# Altium PCB Arduino Shield v1.3.pcbdoc
Units mil, origin at the board's own origin, x right, y up, seen from the top; angles counter-clockwise.
Board outline 4000 x 2100 mil, 2 copper layers (Top Layer, Bottom Layer); 54 components, 94 nets, 211 pads, 0 vias.
Unrouted connection lines stored in the file: 2.
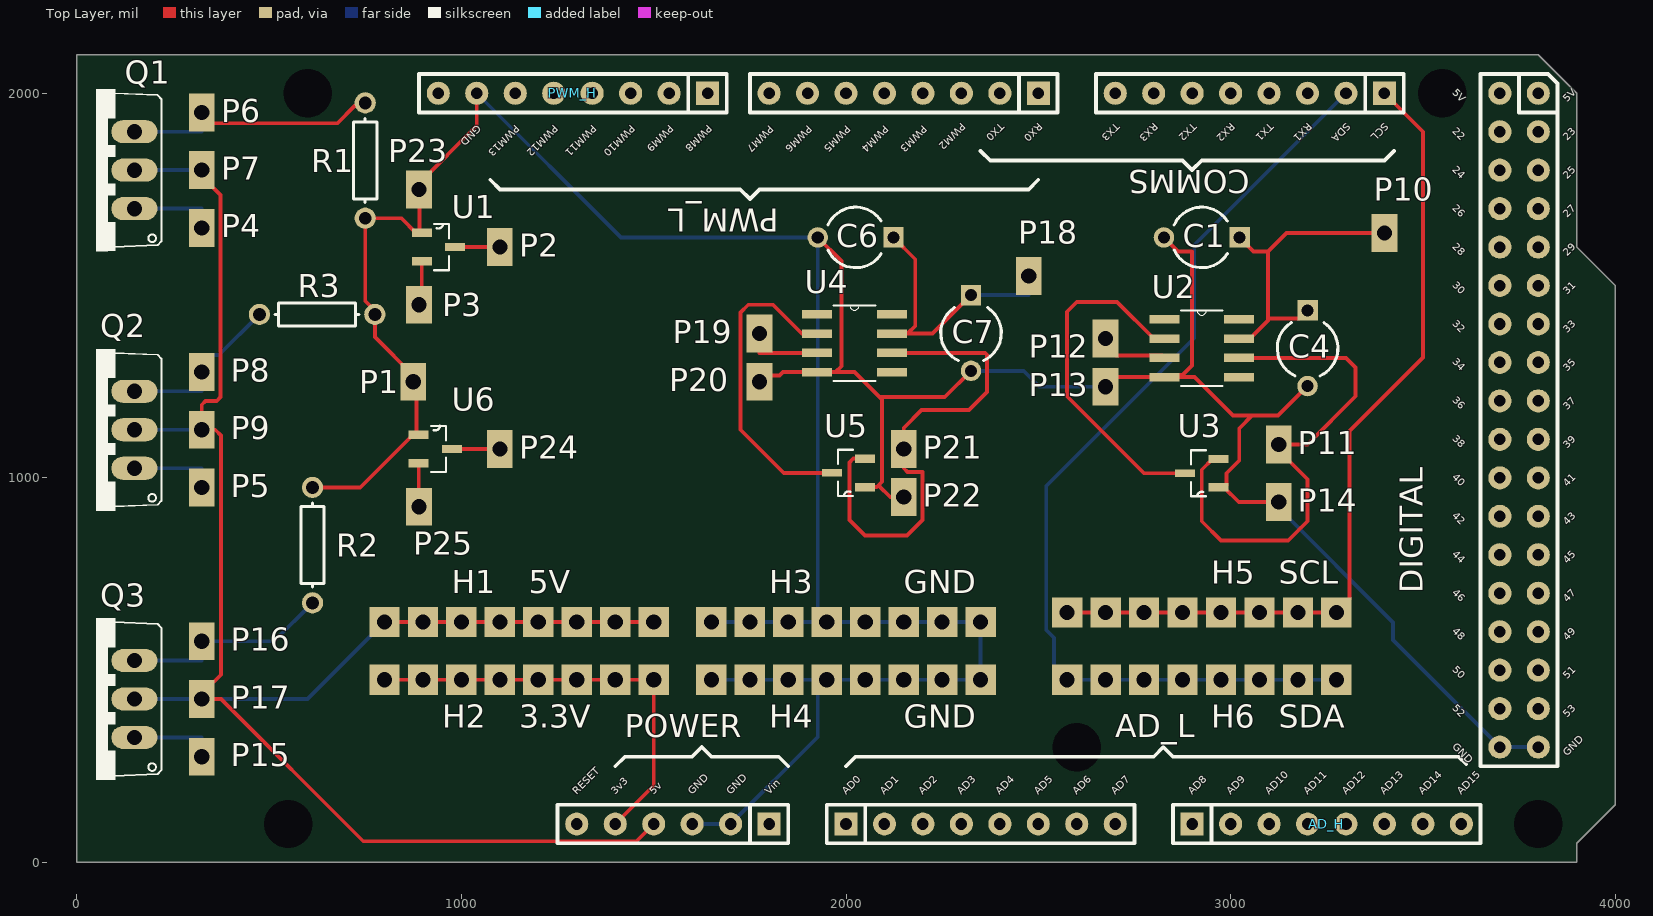
[diagram p0: Top Layer view]
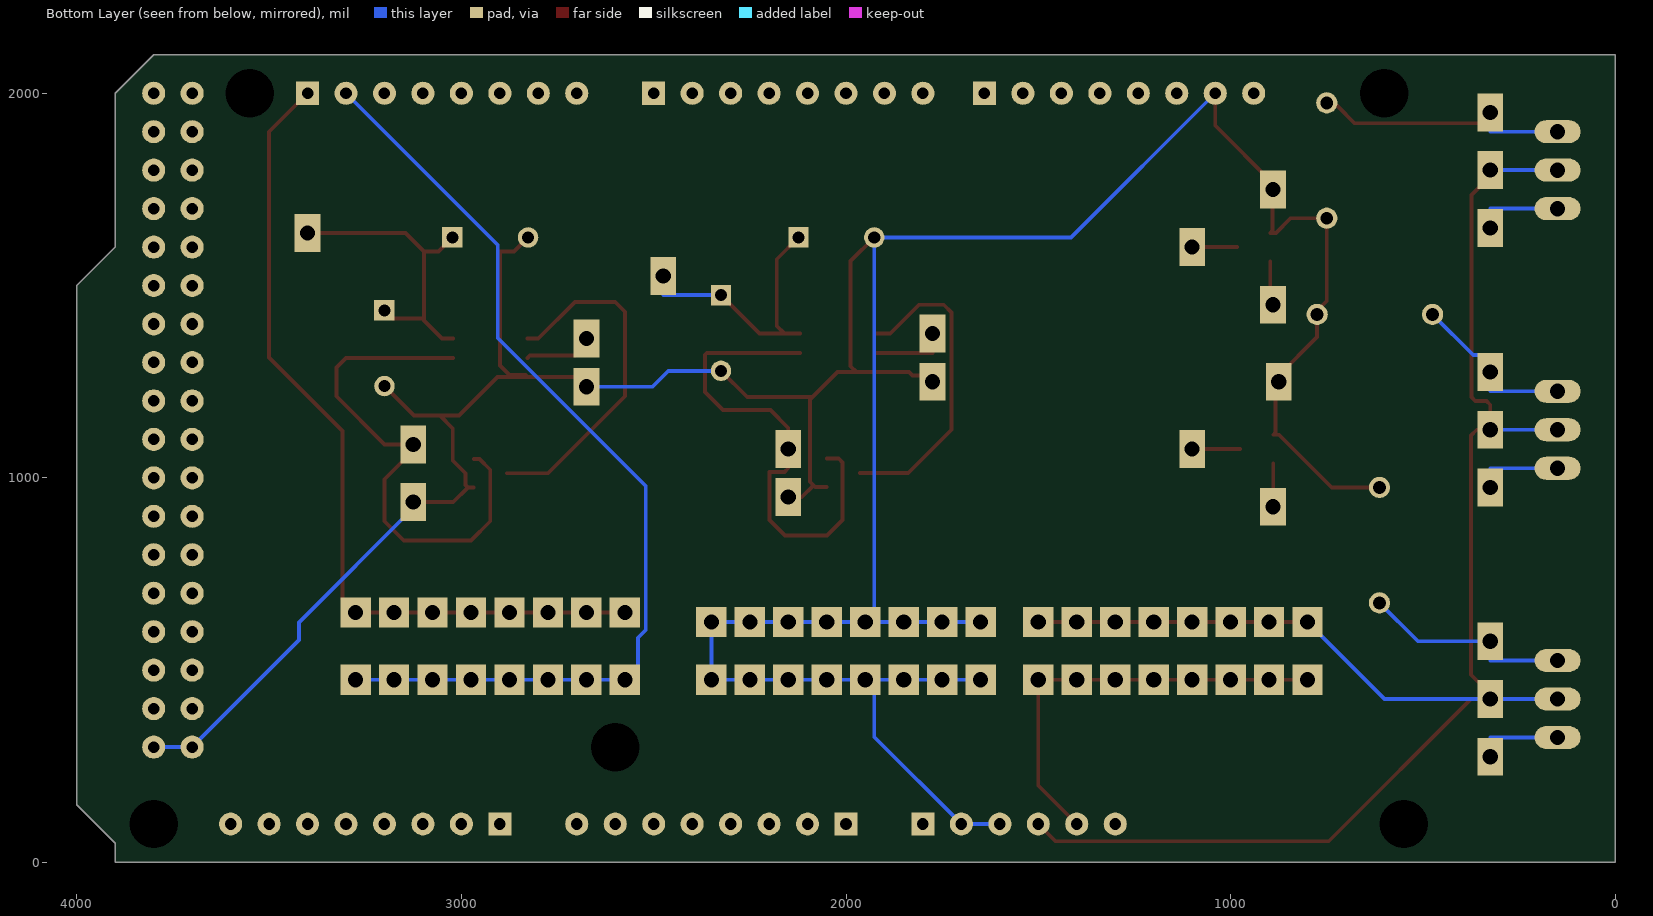
[diagram p1: Bottom Layer view, seen from below]

## Layer stack, top to bottom
Top Solder: solder mask 0.4, Solder Resist, Dk 3.5
Top Layer: signal copper 1.4
Dielectric1: dielectric 12.6, FR-4, Dk 4.8
Bottom Layer: signal copper 1.4
Bottom Solder: solder mask 0.4, Solder Resist, Dk 3.5

## Board outline
0,0 0,2100 3800,2100 3900,2000 3900,1600 4000,1500 4000,150 3900,50 3900,0

## Design rules (kind name [scope] priority, off if disabled: settings)
Clearance [All] p1: gap=10 ignorepadtopadclearanceinfootprint=FALSE except(0: Arc-Hole Track-Hole SMDPad-Hole THPad-Hole Via-Hole Fill-Hole Poly-Hole Region-Hole Text-Hole)
PolygonConnect [All] p1: connectstyle=Relief reliefconductorwidth=10 reliefentries=4 polygonreliefangle="90 Angle" airgapwidth=10
RoutingVias [All] p1: holewidth=28 width=50 viastyle="Through Hole" minholewidth=28 minwidth=50 maxholewidth=28 maxwidth=50
SilkToSolderMaskClearance SilkscreenOverComponentPads [IsPad] p1: minsilkscreentomaskgap=10 clearancetoexposedcopper=TRUE
SolderMaskExpansion [All] p1: expansion=4
Width [All] p1: maxlimit=10 minlimit=10 preferedwidth=10
29 further rules are at their usual default settings.

## Classes and differential pairs
component class "AdruinoMegaSheild v1.1": AD_H AD_L Analog C1 C4 C6 C7 COMMS DIGITAL P2 P4 P5 P6 P7 P8 P9 P10 P11 P12 P13 P14 P15 P16 P18 P19 P20 P21 P22 P24 POWER PWM_H PWM_L Q1 Q2 Q3 U1 U2 U3 U4 U5 U6

## Components (designator, comment, footprint, x,y, rotation, side; value= is the part's Value field where it differs from the comment)
AD_H "AD_H" "Header 8x1 8.5mm" 2900,100 r0 top locked
AD_L "AD_L" "Header 8x1 8.5mm" 2000,100 r0 top locked
C1 "Cap2" CAPR5-4X5 2925,1625 r180 top value=100uF
C4 "Cap2" CAPR5-4X5 3200,1337 r270 top value=100pF
C6 "Cap2" CAPR5-4X5 2025,1625 r180 top value=100uF
C7 "Cap2" CAPR5-4X5 2325,1376.57 r270 top value=100pF
COMMS "Communication" "Header 8x1 8.5mm" 3400,2000 r180 top
DIGITAL "IO_36" "HEADER 36X 8MM" 3800,2000 r270 top locked
H1 "Header 1x8" "Header 1x8 male" 1300,625 r180 top
H2 "Header 1x8" "Header 1x8 male" 1300,475 r180 top
H3 "Header 1x8" "Header 1x8 male" 2150,625 r180 top
H4 "Header 1x8" "Header 1x8 male" 2150,475 r180 top
H5 "Header 1x8" "Header 1x8 male" 3075,650 r180 top
H6 "Header 1x8" "Header 1x8 male" 3075,475 r180 top
P1 "Sig in RN Schmalz" "Header 1x1 long" 875,1250 r0 top
P2 "Sig out RN Schmalz" "Header 1x1 long" 1100,1600 r0 top
P3 "GND RN Schmalz" "Header 1x1 long" 890,1450 r0 top
P4 "X-axis lim switch sig" "Header 1x1 long" 325,1650 r0 top
P5 "Y-axis lim switch sig" "Header 1x1 long" 325,975 r0 top
P6 "FET Source x-axis lim" "Header 1x1 long" 325,1950 r0 top
P7 "FET Drain x-axis lim" "Header 1x1 long" 325,1800 r0 top
P8 "FET Source y-axis lim" "Header 1x1 long" 325,1275 r0 top
P9 "FET Drain y-axis lim" "Header 1x1 long" 325,1125 r0 top
P10 "12VDC" "Header 1x1 long" 3400,1637 r0 top
P11 "AMP HV OUTPUT" "Header 1x1 long" 3125,1087 r0 top
P12 "DAC0 DUE" "Header 1x1 long" 2675,1362 r0 top
P13 "GND AMP HV" "Header 1x1 long" 2675,1237 r0 top
P14 "GND AMP HV" "Header 1x1 long" 3125,937 r0 top
P15 "Z-axis lim switch sig" "Header 1x1 long" 325,275 r0 top
P16 "FET Source z-axis lim" "Header 1x1 long" 325,575 r0 top
P17 "FET Drain z-axis lim" "Header 1x1 long" 325,425 r0 top
P18 "12VDC" "Header 1x1 long" 2475,1525 r0 top
P19 "DAC1 DUE" "Header 1x1 long" 1775,1375 r0 top
P20 "GND AMP SMC" "Header 1x1 long" 1775,1250 r0 top
P21 "AMP SMC OUTPUT" "Header 1x1 long" 2150,1075 r0 top
P22 "GND AMP SMC" "Header 1x1 long" 2150,950 r0 top
P23 "Sig in RN SMC OUT" "Header 1x1 long" 890,1750 r0 top
P24 "Sig out RN SMC OUT" "Header 1x1 long" 1100,1075 r0 top
P25 "GND RN SMC OUT" "Header 1x1 long" 890,925 r0 top
POWER "POWER" "Header 6x1 8.5mm" 1800,100 r180 top locked
PWM_H "PWM_H" "Header 8x1 8.5mm" 1640,2000 r180 top locked
PWM_L "PWM_L" "Header 8x1 8.5mm" 2500,2000 r180 top locked
Q1 "FQP30N06L" *TO220V 50,1800 r90 top
Q2 "FQP30N06L" *TO220V 50,1125 r90 top
Q3 "FQP30N06L" *TO220V 50,425 r90 top
R1 "10k ohm" AXIAL-0.3 750,1825 r90 top value=10k
R2 "10k ohm" AXIAL-0.3 612.99,825 r270 top value=10k
R3 "10k ohm" AXIAL-0.3 625,1425 r180 top value=10k
U1 "5k,10k res network Schmalz" *SOT95P237X112-3N 940,1600 r0 top
U2 "TLV2371IDR" *SOIC127P600X175-8N 2925,1337 r0 top
U3 "REF2940AIDBZR" *SOT95P237X112-3N 2925,1012 r180 top
U4 "TLV2371IDR" *SOIC127P600X175-8N 2022,1350 r0 top
U5 "REF2940AIDBZR" *SOT95P237X112-3N 2007,1013 r180 top
U6 "5k,10k res network SMC OUT" *SOT95P237X112-3N 932,1075 r0 top

## Footprints (in the part's own frame and the unit in brackets; to place one, negate y for a bottom-side part, rotate by r counter-clockwise, add the part's x,y. Pads: shape width x height; smd on the part's side, far side on the other; paste and mask are expansions set on the pad)
*SOIC127P600X175-8N [mil]
  rect 78x22 smd: 1(-97,75) 2(-97,25) 3(-97,-25) 4(-97,-75) 5(97,-75) 6(97,-25) 7(97,25) 8(97,75)
  silkscreen extent -54,-98 54,98
*SOT95P237X112-3N [mil]
  rect 52x22 smd: 1(-43,37) 2(-43,-37)
  rect 52x20 smd: 3(43,0)
  silkscreen extent -11,-60 28,60
*TO220V [mil]
  oval 60x120 hole 40: 1(-100,-100) 2(0,-100) 3(100,-100)
  silkscreen extent -210,-170 210,0
AXIAL-0.3 [mm] "Axial Device, Thru-Hole; 2 Leads; 0.3 in Pin Spacing"
  round 1.4 hole 0.85: 1(-3.81,0) 2(3.81,0)
  silkscreen extent -2.77,-0.76 2.77,0.76
CAPR5-4X5 [mm] "Capacitor; 2 Leads"
  rect 1.35x1.35 hole 0.8: 1(-2.5,0)
  round 1.35 hole 0.8: 2(2.5,0)
  silkscreen extent -1.69,-2 1.82,2
"Header 1x1 long" [mm] "2.54mm"
  rect 1.7x2.5 hole 1: 1(0,0)
"Header 1x8 male" [mm] "2.54mm"
  rect 2x2 hole 1: 1(-5.08,0) 2(-2.54,0) 3(0,0) 4(2.54,0) 5(5.08,0) 6(7.62,0) 7(10.16,0) 8(12.7,0)
  body extent -6.35,-1.27 13.97,1.27, height 8.6
"Header 6x1 8.5mm" [mil] "Stackable 6 pin header"
  rect 60x60 hole 30: 1(0,0)
  round 60 hole 30: 2(100,0) 3(200,0) 4(300,0) 5(400,0) 6(500,0)
  silkscreen extent -50,-50 550,50, body extent -50,-50 550,50, height 335
"Header 8x1 8.5mm" [mil] "Stackable 8 pin header"
  rect 60x60 hole 30: 1(0,0)
  round 60 hole 30: 2(100,0) 3(200,0) 4(300,0) 5(400,0) 6(500,0) 7(600,0) 8(700,0)
  silkscreen extent -50,-50 750,50, body extent -50,-50 750,50, height 335
"HEADER 36X 8MM" [mil] "Stackable 10 pin header"
  round 60 hole 30: 1(0,0) 2(0,-100) 3(100,0) 4(100,-100) 5(200,0) 6(200,-100) 7(300,0) 8(300,-100) 9(400,0) 10(400,-100) 11(500,0) 12(500,-100) 13(600,0) 14(600,-100) 15(700,0) 16(700,-100) 17(800,0) 18(800,-100) 19(900,-100) 20(900,0) 21(1000,0) 22(1000,-100) 23(1100,0) 24(1100,-100) 25(1200,0) 26(1200,-100) 27(1300,0) 28(1300,-100) 29(1400,0) 30(1400,-100) 31(1500,0) 32(1500,-100) 33(1600,0) 34(1600,-100) 35(1700,0) 36(1700,-100)
  silkscreen extent -50,-150 1750,50, body extent -50,-150 1750,50, height 335

## Part data
C1 C4 C6 C7: "Capacitor", PackageDescription="Capacitor; 2 Leads", PackageReference=CAPR5-4X5, Published=23-Sep-2002, Publisher="Altium Limited"
P1 P2 P3 P4 P5 P6 P7 P8 P9 P10 P11 P12 P13 P14 P15 P16 P17 P18 P19 P20 P21 P22 P23 P24 P25: library part "Header 1x1"
Q1: "X-axis limit FET: / MOSFET Transistor, N Channel, 32 A, 60 V, 27 mohm, 10 V, 2.5 V,", Package="TO-220 ON Semiconductor", Availability=Unavailable, MF="ON Semiconductor", MP=FQP30N06L, Price=None, SnapEDA_Link=https://www.snapeda.com/parts/FQP30N06L/ON%20Semiconductor/view-part/?ref=snap
Q2 Q3: "Y-axis limit FET: / MOSFET Transistor, N Channel, 32 A, 60 V, 27 mohm, 10 V, 2.5 V", Package="TO-220 ON Semiconductor", Availability=Unavailable, MF="ON Semiconductor", MP=FQP30N06L, Price=None, SnapEDA_Link=https://www.snapeda.com/parts/FQP30N06L/ON%20Semiconductor/view-part/?ref=snap
R1 R2 R3: library part Res1, "Resistor", LatestRevisionDate=17-Jul-2002, LatestRevisionNote="Re-released for DXP Platform.", PackageDescription="Axial Device, Thru-Hole; 2 Leads; 0.3 in Pin Spacing", PackageReference=AXIAL-0.3, Published=8-Jun-2000, Publisher="Altium Limited"
U1 U6: library part REF2940AIDBZR, "4.096V 100ppm/Degrees C, 50uA in SOT23-3 Series _Bandgap_ Voltage Reference 3-SOT-23 -40 to 125", Package="SOT-23-3 Texas Instruments", Availability=Unavailable, MF="Texas Instruments", MP=REF2940AIDBZR, Price=None, SnapEDA_Link=https://www.snapeda.com/parts/REF2940AIDBZR/Texas%20Instruments/view-part/?ref=snap
U3 U5: "4.096V 100ppm/Degrees C, 50uA in SOT23-3 Series _Bandgap_ Voltage Reference 3-SOT-23 -40 to 125", Package="SOT-23-3 Texas Instruments", Availability=Unavailable, MF="Texas Instruments", MP=REF2940AIDBZR, Price=None, SnapEDA_Link=https://www.snapeda.com/parts/REF2940AIDBZR/Texas%20Instruments/view-part/?ref=snap

## Free pads (board coordinates)
  round 62.99 hole 125.98: 0(550,100) 0(600,2000) 0(2600,300) 0(3550,2000) 0(3800,100)

## Nets (pads, with @x,y where several pads share a name; then routed paths per layer and width w, separated by ;. In a path a pad name is that pad's centre, name@x,y a point inside that pad or via, vN(x,y) a via of type N, cw(c..) or ccw(c..) an arc to the next point about the centre after c; other vN are vias at no path point)
3V3: H2.1 H2.2 H2.3 H2.4 H2.5 H2.6 H2.7 H2.8 POWER.5 | length 1116.4
  Top Layer w10: H2.8 H2.7 H2.6 H2.5 H2.4 H2.3 H2.2 H2.1 1500,200 POWER.5
5V: DIGITAL.1 DIGITAL.2 H1.1 H1.2 H1.3 H1.4 H1.5 H1.6 H1.7 H1.8 P7.1 P9.1 P17.1 POWER.4 Q1.2 Q2.2 Q3.2 | length 4624.2
  Top Layer w10: P7.1 325,1784.25 374,1735.25 374,1210 364,1200 335,1200 325,1190 P9.1 360,1125 375,1110 375,488 325,438 P17.1 375,425 745,55 1455,55 POWER.4 ; H1.8 H1.7 H1.6 H1.5 H1.4 H1.3 H1.2 H1.1
  Bottom Layer w10: Q3.2 P17.1 600,425 H1.8 ; Q2.2 P9.1 ; Q1.2 P7.1
AD0: AD_L.1
AD1: AD_L.2
AD2: AD_L.3
AD3: AD_L.4
AD4: AD_L.5
AD5: AD_L.6
AD6: AD_L.7
AD7: AD_L.8
AD8: AD_H.1
AD9: AD_H.2
AD10: AD_H.3
AD11: AD_H.4
AD12: AD_H.5
AD13: AD_H.6
AD14: AD_H.7
AD15: AD_H.8
AREF: PWM_H.8
GND: C1.2 C4.2 C6.2 C7.2 DIGITAL.35 DIGITAL.36 H3.1 H3.2 H3.3 H3.4 H3.5 H3.6 H3.7 H3.8 H4.1 H4.2 H4.3 H4.4 H4.5 H4.6 H4.7 H4.8 P1.1 P13.1 P14.1 P20.1 P22.1 P23.1 POWER.2 POWER.3 PWM_H.7 R1.1 R2.1 R3.1 U1.1 U2.4 U3.1 U4.4 U5.1 U6.1 | length 9935.4
  Top Layer w10: R2.1 737,975 874,1112 U6.1 883,1118 883,1242 P1.1 875,1265.75 775,1365.75 R3.1 775,1435.19 750,1460.19 R1.1 844,1675 882,1637 U1.1 891,1643 891,1749 P23.1 890,1765.75 1040,1915.75 PWM_H.7 ; P20.1 1775,1266 1827,1266 1836,1275 U4.4 1973,1275 ; C6.2 1988,1563.57 1988,1290 1973,1275 ; U5.1 2080,976 2084.5,980.5 ; P22.1 2115,950 2084.5,980.5 ; C7.2 2256.85,1210 2087,1210 ; P13.1@2675,1262 P13.1 2700,1262 U2.4 ; C1.2 2863,1588.57 2900,1588.57 2900,1292 2875,1267 2833,1267 U2.4 ; U3.1 U3.1@2983,975 ; P14.1@3125,975 P14.1 3021,937 U3.1@2983,975 ; C4.2 3123.43,1162 3055.86,1162 ; 1973,1275 2022,1275 2087,1210 ; 2084.5,980.5 2094,990 2094,1203 2087,1210 ; U2.4 2905.93,1262 3005.93,1162 3055.86,1162 ; U3.1@2983,975 2989,981 2989,1011.79 3022.43,1045.22 3022.43,1128.57 3055.86,1162
  Bottom Layer w10: PWM_H.7 1415,1625 C6.2 H3.5@1926.57,625 ; POWER.3 POWER.2 1926.57,326.57 H4.5@1926.57,475 ; H4.8 H4.7 H4.6 H4.5@1926.57,475 ; H3.8 H3.7 H3.6 H3.5@1926.57,625 ; C7.2 2462,1278.15 2503.15,1237 P13.1 ; P14.1 3125,921.25 3421.95,624.3 3421.95,578.05 DIGITAL.36 DIGITAL.35 ; H4.5@1926.57,475 H4.5 H4.4 H4.3 H4.2 H4.1 H3.1 H3.2 H3.3 H3.4 H3.5 H3.5@1926.57,625
"IN+ AMP HV": P12.1 U2.3 | length 182.9
  Top Layer w10: P12.1 2675,1346.25 2703.46,1317.79 2822.21,1317.79 U2.3
"IN+ AMP SMC": P19.1 U4.3 | length 200
  Top Layer w10: P19.1 1775,1325 U4.3
"IN- AMP HV": U2.2 U3.3 | length 912.5
  Top Layer w10: U2.2 2800,1362 2705,1457 2600,1457 2575,1432 2575,1212 2775,1012 U3.3
"IN- AMP SMC": U4.2 U5.3 | length 827.7
  Top Layer w10: U4.2 1885,1375 1810,1450 1746,1450 1726,1430 1726,1125 1838,1013 U5.3
IO22: DIGITAL.3
IO23: DIGITAL.4
IO24: DIGITAL.5
IO25: DIGITAL.6
IO26: DIGITAL.7
IO27: DIGITAL.8
IO28: DIGITAL.9
IO29: DIGITAL.10
IO30: DIGITAL.11
IO31: DIGITAL.12
IO32: DIGITAL.13
IO33: DIGITAL.14
IO34: DIGITAL.15
IO35: DIGITAL.16
IO36: DIGITAL.17
IO37: DIGITAL.18
IO38: DIGITAL.19
IO39: DIGITAL.20
IO40: DIGITAL.21
IO41: DIGITAL.22
IO42: DIGITAL.23
IO43: DIGITAL.24
IO44: DIGITAL.25
IO45: DIGITAL.26
IO46: DIGITAL.27
IO47: DIGITAL.28
IO48: DIGITAL.29
IO49: DIGITAL.30
IO50: DIGITAL.31
IO51: DIGITAL.32
IO52: DIGITAL.33
IO53: DIGITAL.34
"OUT AMP HV": P11.1 U2.6 U3.2 | length 1376.2
  Top Layer w10: U3.2 2953,1049 2925,1021 2925,887 2975,837 3150,837 3200,887 3200,996.25 3125,1071.25 P11.1 3200,1087 3325,1212 3325,1287 3300,1312 U2.6
"OUT AMP SMC": P21.1 U4.6 U5.2 | length 1304
  Top Layer w10: U5.2 2019,1050 2009,1040 2009,890 2049,850 2159,850 2199,890 2199,1015 2160,1015 2150,1025 P21.1 2150,1130 2196,1176 2320,1176 2367,1223 2367,1320 2362,1325 U4.6
"Pin 1 RN SCHMALZ": P3.1 U1.2 | length 115.9
  Top Layer w10: P3.1 897,1457 U1.2
"Pin 1 RN SMC": P25.1 U6.2 | length 113.4
  Top Layer w10: U6.2 889,926 P25.1
"Pin 3 RN SCHMALZ": P2.1 U1.3 | length 117
  Top Layer w10: U1.3 P2.1
"Pin 3 RN SMC": P24.1 U6.3 | length 125
  Top Layer w10: U6.3 P24.1
PWM2: PWM_L.3
PWM3: PWM_L.4
PWM4: PWM_L.5
PWM5: PWM_L.6
PWM6: PWM_L.7
PWM7: PWM_L.8
PWM8: PWM_H.1
PWM9: PWM_H.2
PWM10: PWM_H.3
PWM11: PWM_H.4
PWM12: PWM_H.5
PWM13: PWM_H.6
RESET: POWER.6
RX0: PWM_L.1
RX1: COMMS.3
RX2: COMMS.5
RX3: COMMS.7
SCL: COMMS.1 H5.1 H5.2 H5.3 H5.4 H5.5 H5.6 H5.7 H5.8 | length 2184.6
  Top Layer w10: H5.8 H5.7 H5.6 H5.5 H5.4 H5.3 H5.2 H5.1 3309.37,684.37 3309.37,1121.87 3500,1312.5 3500,1900 COMMS.1
SDA: COMMS.2 H6.1 H6.2 H6.3 H6.4 H6.5 H6.6 H6.7 H6.8 | length 2570.3
  Bottom Layer w10: H6.1 H6.2 H6.3 H6.4 H6.5 H6.6 H6.7 H6.8 2540.63,509.37 2540.63,584.42 2520.63,604.42 2520.63,978.74 2905.53,1363.64 2905.53,1605.53 COMMS.2
TX0: PWM_L.2
TX1: COMMS.4
TX2: COMMS.6
TX3: COMMS.8
"VDD AMP HV": C1.1 C4.1 P10.1 U2.7 | length 799.9
  Top Layer w10: U2.7 3050,1362 3096.85,1408.85 ; C1.1 3059.85,1588.57 3096.85,1588.57 ; C4.1 3178.43,1413.85 3101.85,1413.85 3096.85,1408.85 ; P10.1 3145.28,1637 3096.85,1588.57 ; 3096.85,1408.85 3096.85,1588.57
"VDD AMP SMC": C6.1 C7.1 P18.1 U4.7 | length 679.1
  Top Layer w10: U4.7 2160,1375 ; C6.1 2180,1568.43 2180,1395 2160,1375 ; C7.1 2225,1375 2160,1375
  Bottom Layer w10: C7.1 2475,1475
VIN: POWER.1
"X lim smoothie": P6.1 Q1.3 R1.2 | length 683.5
  Top Layer w10: P6.1 352.99,1922.01 677.99,1922.01 722.35,1966.37 741.37,1966.37 R1.2
  Bottom Layer w10: Q1.3 325,1900 P6.1
"X-axis lim IN": P4.1 Q1.1 | length 225
  Bottom Layer w10: Q1.1 325,1700 P4.1
"Y lim smoothie": P8.1 Q2.3 R3.2 | length 446.4
  Bottom Layer w10: Q2.3 325,1225 P8.1 325,1290.75 353.46,1319.21 369.21,1319.21 R3.2
"Y-axis lim IN": P5.1 Q2.1 | length 225
  Bottom Layer w10: Q2.1 325,1025 P5.1
"Z lim smoothie": P16.1 Q3.3 R2.2 | length 554.4
  Bottom Layer w10: Q3.3 325,525 P16.1 512.99,575 R2.2
"Z-axis lim IN": P15.1 Q3.1 | length 225
  Bottom Layer w10: Q3.1 325,325 P15.1
pads on no net: U2.1 U2.5 U2.8 U4.1 U4.5 U4.8

## Silkscreen, mask and mechanical layers (free items; w line width, h text height)
Top Overlay:
  lines w10: 1075,1775 1100,1750 1725,1750 1750,1725 1775,1750 2475,1750 2500,1775 ; 1400,250 1425,275 1600,275 1625,300 1650,275 1825,275 1850,250 ; 2000,250 2025,275 2800,275 2825,300 2850,275 3592.93,275 3612.7,255.23 ; 2350,1850 2375,1825 2875,1825 2900,1800 2925,1825 3400,1825 3425,1850
  text "5V" at 3575,2000 h20 r315
  text "5V" at 3875,1975 h20 r45
  text "PWM2" at 2300,1925 h20 r225
  text "TX0" at 2400,1925 h20 r225
  text "RX0" at 2500,1925 h20 r225
  text "TX3" at 2700,1925 h20 r225
  text "RX3" at 2800,1925 h20 r225
  text "TX2" at 2900,1925 h20 r225
  text "RX2" at 3000,1925 h20 r225
  text "TX1" at 3100,1925 h20 r225
  text "RX1" at 3200,1925 h20 r225
  text "SDA" at 3300,1925 h20 r225
  text "SCL" at 3400,1925 h20 r225
  text "GND" at 1040,1920 h20 r225
  text "PWM13" at 1140,1920 h20 r225
  text "PWM12" at 1240,1920 h20 r225
  text "PWM11" at 1340,1920 h20 r225
  text "PWM10" at 1440,1920 h20 r225
  text "PWM9" at 1540,1920 h20 r225
  text "PWM8" at 1640,1920 h20 r225
  text "PWM7" at 1800,1917.93 h20 r225
  text "PWM6" at 1900,1917.93 h20 r225
  text "PWM5" at 2000,1917.93 h20 r225
  text "PWM4" at 2100,1917.93 h20 r225
  text "PWM3" at 2200,1917.93 h20 r225
  text "22" at 3575,1900 h20 r315
  text "23" at 3875,1875 h20 r45
  text "24" at 3575,1800 h20 r315
  text "25" at 3875,1775 h20 r45
  text "26" at 3575,1700 h20 r315
  text "27" at 3875,1675 h20 r45
  text "28" at 3575,1600 h20 r315
  text "29" at 3875,1575 h20 r45
  text "30" at 3575,1500 h20 r315
  text "31" at 3875,1475 h20 r45
  text "32" at 3575,1400 h20 r315
  text "33" at 3875,1375 h20 r45
  text "34" at 3575,1300 h20 r315
  text "35" at 3875,1275 h20 r45
  text "36" at 3575,1200 h20 r315
  text "37" at 3875,1175 h20 r45
  text "38" at 3575,1100 h20 r315
  text "39" at 3875,1075 h20 r45
  text "40" at 3575,1000 h20 r315
  text "41" at 3875,975 h20 r45
  text "42" at 3575,900 h20 r315
  text "43" at 3875,875 h20 r45
  text "44" at 3575,800 h20 r315
  text "45" at 3875,775 h20 r45
  text "SCL" at 3125,725.01 h60
  text "5V" at 1175,700 h60
  text "GND" at 2150,700 h60
  text "46" at 3575,700 h20 r315
  text "47" at 3875,675 h20 r45
  text "48" at 3575,600 h20 r315
  text "49" at 3875,575 h20 r45
  text "50" at 3575,500 h20 r315
  text "51" at 3875,475 h20 r45
  text "52" at 3575,400 h20 r315
  text "53" at 3875,375 h20 r45
  text "3.3V" at 1150,350 h60
  text "GND" at 2150,350.01 h60
  text "SDA" at 3125,350.01 h60
  text "GND" at 3575,300 h20 r315
  text "GND" at 3875,275 h20 r45
  text "RESET" at 1300,175 h20 r45
  text "3v3" at 1400,175 h20 r45
  text "5v" at 1500,175 h20 r45
  text "GND" at 1600,175 h20 r45
  text "GND" at 1700,175 h20 r45
  text "Vin" at 1800,175 h20 r45
  text "AD0" at 2000,175 h20 r45
  text "AD1" at 2100,175 h20 r45
  text "AD2" at 2200,175 h20 r45
  text "AD3" at 2300,175 h20 r45
  text "AD4" at 2400,175 h20 r45
  text "AD5" at 2500,175 h20 r45
  text "AD6" at 2600,175 h20 r45
  text "AD7" at 2700,175 h20 r45
  text "AD8" at 2900,175 h20 r45
  text "AD9" at 3000,175 h20 r45
  text "AD10" at 3100,175 h20 r45
  text "AD11" at 3200,175 h20 r45
  text "AD12" at 3300,175 h20 r45
  text "AD13" at 3400,175 h20 r45
  text "AD14" at 3500,175 h20 r45
  text "AD15" at 3600,175 h20 r45
Mechanical 1:
  circle w5: c3800,100 r62.99
  circle w5: c3550,2000 r62.99
  circle w5: c550,100 r62.99
  circle w5: c2600,300 r62.99
  circle w5: c600,2000 r62.99
  lines w5: 0,0 0,2100 3800,2100 3900,2000 3900,1600 4000,1500 4000,150 3900,50 3900,0 0,0

## Text inside footprints (layer, text, board x,y; h text height)
Q1: Mechanical 4 "1" at 185.09,1674.75 h73.82 r90; Mechanical 4 "2" at 185.01,1774.97 h73.82 r90; Mechanical 4 "3" at 184.95,1875.06 h73.82 r90; Mechanical 4 "1" at 185.09,1674.75 h73.82 r90; Mechanical 4 "2" at 185.01,1774.97 h73.82 r90; Mechanical 4 "3" at 184.95,1875.06 h73.82 r90
Q2: Mechanical 4 "1" at 185.09,999.75 h73.82 r90; Mechanical 4 "2" at 185.01,1099.97 h73.82 r90; Mechanical 4 "3" at 184.95,1200.06 h73.82 r90; Mechanical 4 "1" at 185.09,999.75 h73.82 r90; Mechanical 4 "2" at 185.01,1099.97 h73.82 r90; Mechanical 4 "3" at 184.95,1200.06 h73.82 r90
Q3: Mechanical 4 "1" at 185.09,299.75 h73.82 r90; Mechanical 4 "2" at 185.01,399.97 h73.82 r90; Mechanical 4 "3" at 184.95,500.06 h73.82 r90; Mechanical 4 "1" at 185.09,299.75 h73.82 r90; Mechanical 4 "2" at 185.01,399.97 h73.82 r90; Mechanical 4 "3" at 184.95,500.06 h73.82 r90